# Altium PCB PCB_BearlyML Carrier Board_2022-12-21.pcbdoc (part 2 of 2)
Units mm, origin at the board's own origin, x right, y up, seen from the top; angles counter-clockwise.
Board outline 241.4 x 137.4 mm, 2 copper layers (Top Layer, Bottom Layer); 88 components, 113 nets, 672 pads, 238 vias.
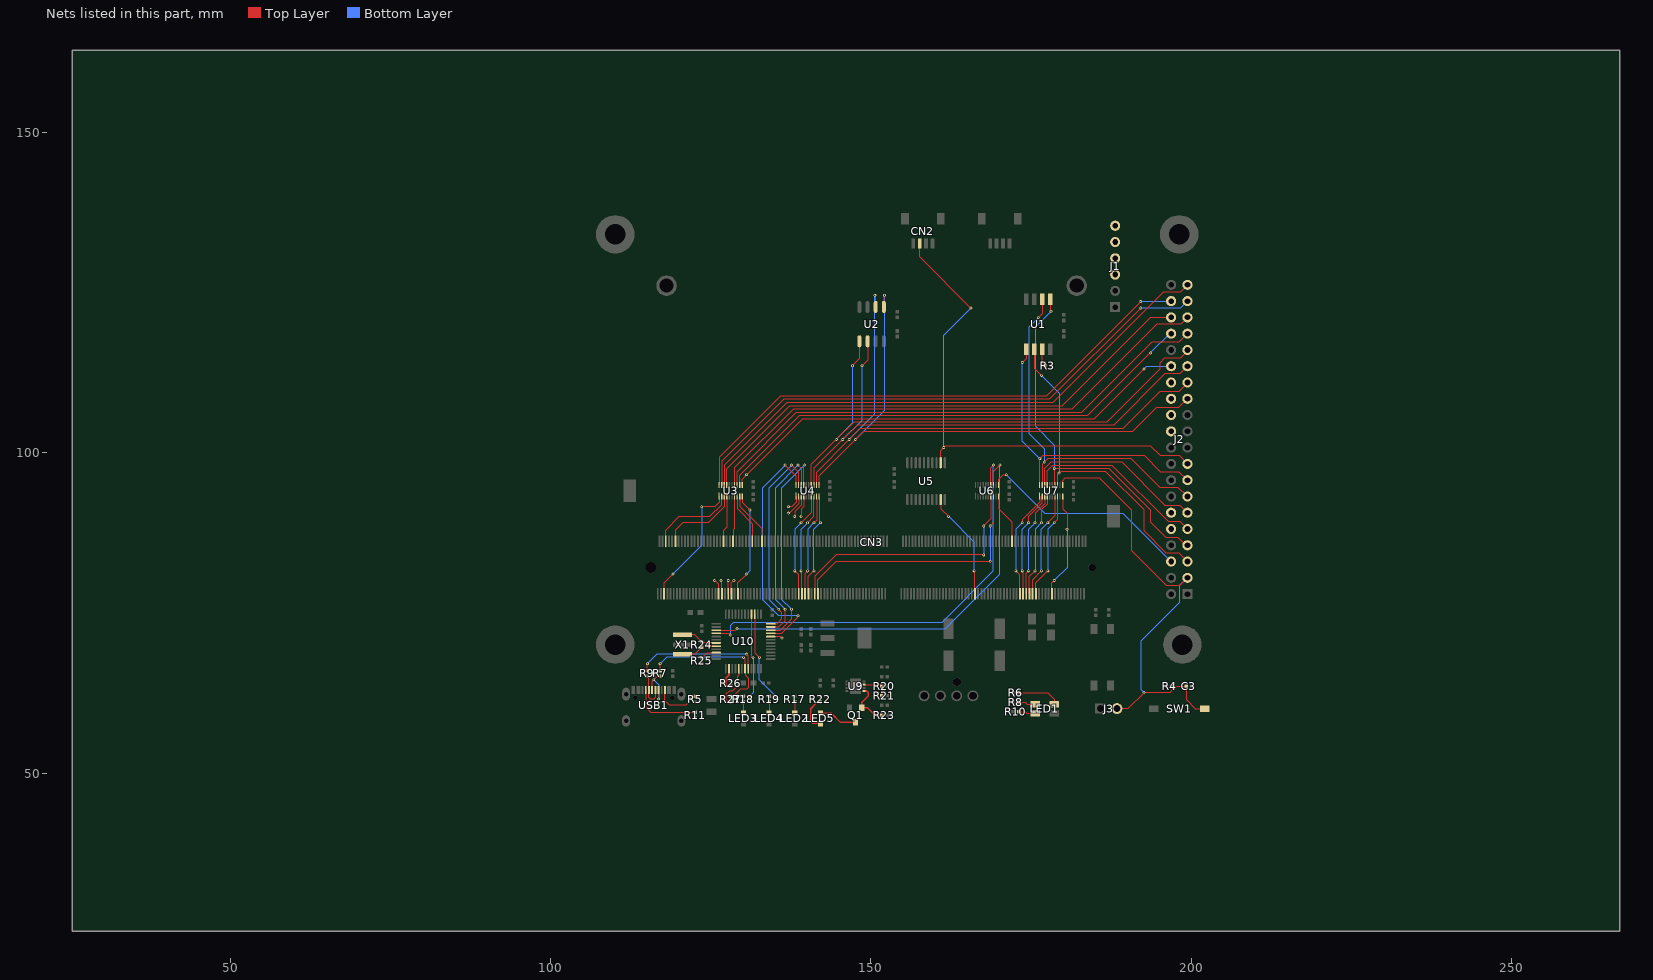
[diagram p2: the nets of this part, all layers, seen from the top]

## Via types
v1: diameter 0.45, hole 0.2, Top Layer to Bottom Layer, tented both sides, 238 vias

## Nets (pads, with @x,y where several pads share a name; then routed paths per layer and width w, separated by ;. In a path a pad name is that pad's centre, name@x,y a point inside that pad or via, vN(x,y) a via of type N, cw(c..) or ccw(c..) an arc to the next point about the centre after c; other vN are vias at no path point) (continued)
I2C1_SDA_1V8: CN3.191 U5.9 | length 16.9
  Top Layer w0.15: U5.9@160.875,92.729 160.875,91.325 v1(162.1,90.1) ; v1(166.1,81.6) 166.225,81.475 CN3.191@166.225,78.05
  Bottom Layer w0.15: v1(162.1,90.1) 166.1,86.1 v1(166.1,81.6)
I2C1_SDA_3V3: CN2.3 J2.17 U5.12 | length 78.8
  Top Layer w0.15: CN2.3@157.599,132.662 157.599,130.6 v1(165.6,122.6) ; U5.12@160.875,98.471 160.875,100.375 v1(161.35,100.85) 161.6,101.1 193.6,101.1 195.101,99.599 198.101,99.599 199.371,98.329 J2.17@199.371,98.289
  Bottom Layer w0.15: v1(161.35,100.85) 161.35,118.35 v1(165.6,122.6)
JTAG_TCK_1V8: CN3.41 U4.2 | length 20.3
  Top Layer w0.15: v1(126.6,80.1) 126.725,79.975 CN3.41@126.725,78.05 ; v1(137.1,90.6) 137.225,90.6 138.7,92.076 U4.2@138.699,93.199
  Mid-Layer 1 w0.15: v1(126.6,80.1) v1(137.1,90.6)
JTAG_TCK_3V3: J2.26 U4.19 U10.24 | length 95.4
  Top Layer w0.15: U10.24@134.35,73.35 135.35,73.35 136.1,74.1 136.1,75.1 v1(135.6,75.6) ; v1(137.6,98.1) 138.7,97 U4.19@138.7,95
  Mid-Layer 1 w0.15: v1(137.6,98.1) 147.95,108.45 J2.26@196.83,108.45
  Bottom Layer w0.15: v1(135.6,75.6) 134.1,77.1 134.1,88.1 134.1,94.6 v1(137.6,98.1)
JTAG_TDI_1V8: CN3.45 U4.3 | length 20.2
  Top Layer w0.15: CN3.45@127.725,78.05 v1(127.725,80.1) ; v1(138.1,90.1) 138.101,90.852 139.099,91.85 U4.3@139.099,93.199
  Mid-Layer 1 w0.15: v1(127.725,80.1) 127.725,80.224 130.1,82.599 130.6,82.599 v1(138.1,90.1)
JTAG_TDI_3V3: J2.24 U4.18 U10.23 | length 93.8
  Top Layer w0.15: U10.23@134.349,72.851 135.599,72.851 136.6,73.849 v1@136.6,75.599 ; v1(138.6,98.1) 139.1,97.6 U4.18@139.1,95
  Mid-Layer 1 w0.15: v1(138.6,98.1) 146.41,105.91 J2.24@196.83,105.91
  Bottom Layer w0.15: v1@136.6,75.6 135.1,77.1 135.1,94.6 v1(138.6,98.1)
  other v1: 136.6,75.6
JTAG_TDO_1V8: CN3.47 U4.4 | length 20.1
  Top Layer w0.15: CN3.47@128.225,78.05 128.225,79.725 v1(128.6,80.1) ; v1@139.099,90.1 139.099,91.225 139.5,91.626 U4.4@139.499,93.199
  Mid-Layer 1 w0.15: v1@128.599,80.1 130.349,81.85 130.849,81.85 v1@139.099,90.1
  other v1: 139.1,90.1
JTAG_TDO_3V3: J2.22 U4.17 U10.22 | length 92.6
  Top Layer w0.15: U10.22@134.35,72.35 135.85,72.35 137.1,73.6 137.6,74.1 v1(137.6,75.6) ; U4.17@139.5,95 139.5,98 v1(139.6,98.1)
  Mid-Layer 1 w0.15: v1(139.6,98.1) 144.87,103.37 J2.22@196.83,103.37
  Bottom Layer w0.15: v1(137.6,75.6) 136.1,77.1 136.1,92.1 136.1,94.6 v1(139.6,98.1)
JTAG_TMS_1V8: CN3.39 U4.1 | length 21
  Top Layer w0.15: v1(125.6,80.1) 126.225,79.475 CN3.39@126.225,78.05 ; v1(137.1,91.6) 137.6,91.601 138.299,92.3 U4.1@138.299,93.249
  Mid-Layer 1 w0.15: v1(125.6,80.1) v1(137.1,91.6)
JTAG_TMS_3V3: J2.28 U4.20 U10.21 | length 103.9
  Top Layer w0.15: U10.21@134.349,71.85 136.099,71.85 138.601,74.349 v1(138.6,74.6) ; v1(136.6,98.1) 137.6,97.1 138.3,96.4 U4.20@138.3,95
  Mid-Layer 1 w0.15: v1@136.6,98.1 149.49,110.99 J2.28@196.83,110.99
  Bottom Layer w0.15: v1@136.6,98.101 133.1,94.601 133.1,77.1 135.599,74.601 v1@138.599,74.601
JTAG_TRST_1V8: CN3.51 U3.10 | length 16.4
  Top Layer w0.15: CN3.51@129.225,78.05 129.225,79.725 v1(130.6,81.1) ; U3.10@129.9,93.2 129.9,92.3 v1(131.1,91.1)
  Bottom Layer w0.15: v1(130.6,81.1) 131.1,81.6 v1(131.1,91.1)
JTAG_TRST_3V3: J2.30 U3.11 U10.20 | length 111.3
  Top Layer w0.15: U3.11@129.899,95 129.899,95.899 139.35,105.35 184.85,105.35 v1@192.599,113.1 ; U10.20@134.35,71.35 135.85,71.35 v1(136.1,71.1)
  Mid-Layer 1 w0.15: v1(130.6,96.6) 129.35,95.35 129.35,94.1 124.6,89.35 124.6,79.85 130.6,73.85 133.35,73.85 v1(136.1,71.1)
  Bottom Layer w0.15: v1(192.6,113.1) 193.029,113.529 J2.30@196.831,113.529
LED5_2: LED5.2 Q1.3 | length 6.1
  Top Layer w0.25: LED5.2@142.1,59.4 143.8,59.4 145.25,57.95 Q1.3@147.6,57.95
QSPI0_CS_1V8: CN3.227 U7.7 | length 16.6
  Top Layer w0.15: CN3.227@175.225,78.05 175.225,80.225 v1(176.6,81.6) ; v1(177.6,89.1) 178.7,90.2 U7.7@178.7,93.2
  Bottom Layer w0.15: v1(176.6,81.6) 176.6,88.1 v1(177.6,89.1)
QSPI0_CS_3V3: J1.6 J2.7 U1.1 U7.14 | length 75.7
  Top Layer w0.15: U1.1@178.004,124.001 178.004,122.196 v1(178.099,122.101) ; v1(178.6,97.6) 178.7,97.499 U7.14@178.7,94.999 ; v1(178.6,97.6) 187.1,97.601 193.6,91.101 193.6,89.226 195.975,86.849 197.849,86.849 199.109,85.589 J2.7@199.371,85.589
  Mid-Layer 1 w0.15: v1(178.099,122.101) 178.099,125.447 J1.6@188.101,135.449
  Bottom Layer w0.15: v1@178.098,122.102 175.599,119.603 175.599,104.225 178.601,101.223 v1(178.6,97.6)
QSPI0_DQ0_1V8: CN3.219 U7.1 | length 17
  Top Layer w0.15: v1(172.6,81.6) 173.225,80.975 CN3.219@173.225,78.05 ; v1@173.6,89.099 173.6,89.6 176.3,92.3 U7.1@176.3,93.249
  Bottom Layer w0.15: v1(172.6,81.6) 172.6,88.1 v1(173.6,89.1)
QSPI0_DQ0_3V3: J1.4 J2.15 U1.5 U7.20 | length 70.9
  Top Layer w0.15: v1(173.599,114.101) 174.194,114.696 U1.5@174.194,116.201 ; U7.20@176.3,94.999 176.3,99.05 v1(176.35,99.1) 176.85,99.6 192.6,99.6 195.099,97.1 198.019,97.1 J2.15@199.371,95.749
  Mid-Layer 1 w0.15: v1(173.599,114.101) 175.601,114.101 185.599,124.098 185.599,127.598 188.101,130.1 J1.4@188.101,130.37
  Bottom Layer w0.15: v1(173.599,114.101) 173.599,101.851 v1(176.35,99.1)
QSPI0_DQ1_1V8: CN3.221 U7.2 | length 16.5
  Top Layer w0.15: v1(173.6,81.6) 173.725,81.475 CN3.221@173.725,78.05 ; v1@174.601,89.099 174.601,90.1 176.699,92.2 U7.2@176.699,93.199
  Bottom Layer w0.15: v1(173.6,81.6) 173.6,88.1 v1(174.6,89.1)
QSPI0_DQ1_3V3: J1.5 J2.13 U1.2 U7.19 | length 75
  Top Layer w0.15: v1@176.099,121.101 176.734,121.736 U1.2@176.734,124.001 ; U7.19@176.699,95 176.699,98.199 v1(177.1,98.6) 177.6,99.1 190.6,99.1 195.099,94.601 197.979,94.601 J2.13@199.371,93.209
  Mid-Layer 1 w0.15: v1(176.099,121.101) 180.1,121.101 184.601,125.599 184.601,129.407 J1.5@188.101,132.91
  Bottom Layer w0.15: v1(176.099,121.101) 174.725,119.727 174.725,102.976 177.1,100.601 v1(177.1,98.6)
QSPI0_DQ2_1V8: CN3.223 U7.3 | length 16.3
  Top Layer w0.15: CN3.223@174.225,78.045 174.225,81.225 v1@174.601,81.599 ; v1@175.599,89.099 175.599,90.598 177.1,92.099 U7.3@177.1,93.199
  Bottom Layer w0.15: v1(174.6,81.6) 174.6,88.1 v1(175.6,89.1)
QSPI0_DQ2_3V3: J2.11 U7.18 | length 28.6
  Top Layer w0.15: U7.18@177.1,94.999 177.1,97.601 178.101,98.599 189.099,98.599 195.85,91.85 198.19,91.85 J2.11@199.371,90.669
QSPI0_DQ3_1V8: CN3.225 U7.4 | length 16.3
  Top Layer w0.15: CN3.225@174.725,78.05 174.725,80.725 v1(175.6,81.6) ; v1@176.6,89.099 176.6,91.101 177.499,92 U7.4@177.499,93.199
  Bottom Layer w0.15: v1(175.6,81.6) 175.6,88.1 v1(176.6,89.1)
QSPI0_DQ3_3V3: J2.9 U7.17 | length 28.6
  Top Layer w0.15: U7.17@177.5,95 177.5,97.25 178.35,98.1 187.6,98.1 196.35,89.35 198.149,89.35 J2.9@199.37,88.13
QSPI0_SCLK_1V8: CN3.229 U7.8 | length 16.5
  Top Layer w0.15: CN3.229@175.725,78.05 175.725,79.724 v1(177.6,81.6) ; v1(178.6,89.1) 179.1,89.6 U7.8@179.1,93.2
  Bottom Layer w0.15: v1(177.6,81.6) 177.6,88.1 v1(178.6,89.1)
QSPI0_SCLK_3V3: J1.3 J2.5 U1.6 U7.13 | length 71.4
  Top Layer w0.15: U1.6@175.464,116.201 175.464,113.236 v1(176.599,112.101) ; U7.13@179.1,94.999 179.1,96.6 v1(179.35,96.85) ; v1@179.35,96.849 179.599,97.1 186.6,97.1 192.599,91.101 192.599,87.849 196.099,84.349 198.07,84.349 J2.5@199.371,83.049
  Mid-Layer 1 w0.15: v1(176.599,112.101) 186.6,122.102 186.6,126.6 187.829,127.829 J1.3@188.101,127.829
  Bottom Layer w0.15: v1(176.599,112.101) 179.35,109.35 v1(179.35,96.85)
R3_1: R3.1 U1.7 | length 2.8
  Top Layer w0.15: U1.7@176.734,116.201 176.734,114.033 R3.1@177.166,113.601
R5_1: R5.1 USB1.B5 | length 7.7
  Top Layer w0.15: USB1.B5@117.849,63.016 117.849,61.35 118.599,60.6 121.101,60.6 121.601,61.101 121.601,61.601 122.099,62.099 122.533,62.099 R5.1@122.599,62.033
R6_1: LED1.3 R6.1 | length 6.8
  Top Layer w0.15: R6.1@173.032,62.599 177.6,62.599 178.599,61.601 LED1.3@178.599,60.801
R7_1: R7.1 USB1.A6 USB1.B6 | length 7.6
  Top Layer w0.15: USB1.A6@115.85,63.015 115.85,64.35 v1(116.1,64.6) 116.667,65.167 R7.1@117.1,65.167 ; v1(116.85,61.6) USB1.B6@116.85,63.015
  Bottom Layer w0.15: v1(116.1,64.6) 116.85,63.85 v1(116.85,61.6)
R8_1: LED1.1 R8.1 | length 2.7
  Top Layer w0.15: R8.1@173.032,61.101 174.1,61.1 174.4,60.8 LED1.1@175.6,60.8
R9_1: R9.1 USB1.A7 USB1.B7 | length 5.8
  Top Layer w0.15: R9.1@115.101,65.166 115.35,64.917 USB1.B7@115.35,63.015 115.35,61.85 115.6,61.6 116.1,61.6 116.35,61.85 USB1.A7@116.35,63.015
R10_1: LED1.2 R10.1 | length 2.6
  Top Layer w0.15: R10.1@173.032,59.6 174.1,59.6 174.3,59.4 LED1.2@175.6,59.4
R11_1: R11.1 USB1.A5 | length 10.8
  Top Layer w0.15: USB1.A5@114.85,63.015 114.85,60.35 115.667,59.533 R11.1@122.6,59.533
R17_2: LED2.2 R17.2 | length 1.8
  Top Layer w0.15: LED2.2@138.1,59.4 R17.2@138.101,61.168
R18_2: LED3.2 R18.2 | length 1.8
  Top Layer w0.15: LED3.2@130.1,59.4 R18.2@130.1,61.168
R19_2: LED4.2 R19.2 | length 1.8
  Top Layer w0.15: LED4.2@134.1,59.4 R19.2@134.1,61.168
R21_2: R20.1 R21.2 U9.7 | length 4.3
  Top Layer w0.15: U9.7@148.925,63.85 151.417,63.85 R20.1@151.666,63.6 R21.2@151.667,62.1
R22_1: LED5.1 R22.1 | length 5.6
  Top Layer w0.25: LED5.1@142.1,57.8 140.9,57.8 140.6,58.1 140.6,60.1 141.667,61.167 R22.1@142.1,61.167
R23_1: Q1.1 R23.1 U9.5 | length 7.2
  Top Layer w0.25: Q1.1@148.55,60.25 149.45,60.25 150.6,59.1 R23.1@151.667,59.1 ; Q1.1@148.55,60.25 148.55,61.05 149.599,62.099 149.599,62.599 149.35,62.851 U9.5@148.924,62.851
R24_1: R24.1 U10.43 X1.1 | length 5.8
  Top Layer w0.15: X1.1@120.6,71.6 122.533,71.6 R24.1@123.6,70.533 123.783,70.35 U10.43@125.85,70.35
R24_2: R24.2 U10.44 X1.3 | length 5.8
  Top Layer w0.15: X1.3@120.6,68.6 122.533,68.6 R24.2@123.6,69.667 123.783,69.85 U10.44@125.85,69.85
R25_2: R25.2 U10.46 | length 2.6
  Top Layer w0.15: R25.2@123.6,68.033 124.417,68.85 U10.46@125.85,68.85
R26_2: R26.2 U10.2 | length 3.5
  Top Layer w0.3: U10.2@127.85,66.35 127.85,65.35 127.35,64.85 127.35,63.85 127.533,63.667 R26.2@128.101,63.668
R27_2: R27.2 U10.5 | length 6.8
  Top Layer w0.15: R27.2@128.101,61.167 127.783,61.167 127.349,61.601 127.349,62.35 127.849,62.851 128.35,62.851 129.099,63.6 129.099,65.099 129.351,65.35 U10.5@129.35,66.35
RESET_1V8: CN3.239 U7.10 | length 16.4
  Top Layer w0.15: CN3.239@178.225,78.05 178.225,79.725 v1(178.6,80.1) ; U7.10@179.9,93.2 179.9,91.3 180.6,90.6 v1(180.6,88.1)
  Bottom Layer w0.15: v1(178.6,80.1) 180.6,82.1 v1(180.6,88.1)
RESET_3V3: C3.2 J2.3 J3.2 R4.2 SW1.1 U7.11 | length 70.6
  Top Layer w0.15: U7.11@179.899,95 179.899,95.65 180.349,96.099 185.601,96.099 190.6,91.101 190.6,84.85 196.099,79.351 198.21,79.351 J2.3@199.371,80.509 ; J3.2@188.37,60.1 190.1,60.1 192.599,62.599 196.6,62.599 197.031,63.034 R4.2@197.031,63.6 ; R4.2@197.032,63.6 C3.2@199.166,63.6 199.167,61.533 200.6,60.1 SW1.1@202.05,60.1
  Bottom Layer w0.15: v1(192.6,62.6) 192.1,63.1 192.1,70.6 198.1,76.6 198.1,79.24 J2.3@199.37,80.51
RXLED: R18.1 U10.28 | length 14.1
  Top Layer w0.15: R18.1@130.1,62.033 130.167,62.1 v1(131.1,62.1) ; U10.28@131.35,74.85 131.35,68.35 v1(131.6,68.1)
  Bottom Layer w0.15: v1(131.1,62.1) 131.6,62.6 v1(131.6,68.1)
S$50: 
S$54: 
S$56: 
S$58: 
S$17923: 
S$36663: 
S$36667: 
S$36675: 
S$64641: 
SPI1_CS_1V8: CN3.95 U4.10 | length 16
  Top Layer w0.15: CN3.95@140.225,78.05 140.225,80.725 v1(141.1,81.6) ; U4.10@141.9,93.2 141.9,89.3 v1(142.1,89.1)
  Bottom Layer w0.15: v1(141.1,81.6) 141.1,88.1 v1(142.1,89.1)
SPI1_CS_3V3: J2.25 U2.1 U4.11 | length 90.1
  Top Layer w0.15: U4.11@141.899,94.999 141.901,96.401 v1(147.6,102.1) 148.851,103.351 190.849,103.351 194.601,107.1 198.019,107.1 J2.25@199.371,108.449 ; U2.1@152.005,122.782 152.1,122.877 v1(152.1,124.6)
  Bottom Layer w0.15: v1(147.6,102.1) 152.1,106.6 v1(152.1,124.6)
SPI1_MISO_1V8: CN3.93 U4.9 | length 15.9
  Top Layer w0.15: CN3.93@139.725,78.05 139.725,81.225 v1(140.1,81.6) ; v1(141.1,89.1) 141.5,89.5 U4.9@141.5,93.2
  Bottom Layer w0.15: v1(140.1,81.6) 140.1,88.1 v1(141.1,89.1)
SPI1_MISO_3V3: J2.27 U2.2 U4.12 | length 91.8
  Top Layer w0.15: U4.12@141.499,94.999 141.499,96.999 v1(146.6,102.1) 148.349,103.849 189.35,103.849 195.101,109.599 198.101,109.599 199.371,110.869 J2.27@199.371,110.989 ; v1(150.6,124.6) 150.735,124.465 U2.2@150.735,122.782
  Bottom Layer w0.15: v1(146.6,102.1) 150.6,106.1 v1(150.6,124.6)
SPI1_MOSI_1V8: CN3.89 U4.7 | length 16.5
  Top Layer w0.15: v1(138.1,81.6) 138.725,80.975 CN3.89@138.725,78.05 ; v1(139.1,89.1) 140.7,90.7 U4.7@140.7,93.2
  Bottom Layer w0.15: v1(138.1,81.6) 138.1,88.1 v1(139.1,89.1)
SPI1_MOSI_3V3: J2.31 U2.5 U4.14 | length 86.8
  Top Layer w0.15: U4.14@140.699,94.999 140.699,98.199 v1(144.6,102.1) ; v1@144.601,102.099 147.349,104.85 186.848,104.85 195.101,113.1 195.101,114.1 195.85,114.85 198.35,114.85 199.371,115.871 J2.31@199.371,116.069 ; v1(147.1,113.6) 148.195,114.695 U2.5@148.195,117.416
  Bottom Layer w0.15: v1(144.6,102.1) 147.1,104.6 v1(147.1,113.6)
SPI1_SCLK_1V8: CN3.91 U4.8 | length 16
  Top Layer w0.15: v1(139.1,81.6) 139.225,81.475 CN3.91@139.225,78.05 ; v1(140.1,89.1) 141.1,90.1 U4.8@141.1,93.2
  Bottom Layer w0.15: v1(139.1,81.6) 139.1,88.1 v1(140.1,89.1)
SPI1_SCLK_3V3: J2.29 U2.6 U4.13 | length 84.4
  Top Layer w0.15: U4.13@141.099,94.999 141.101,97.601 v1(145.6,102.1) 147.849,104.349 187.849,104.349 195.85,112.35 198.19,112.35 J2.29@199.371,113.529 ; v1(148.6,113.6) 149.465,114.465 U2.6@149.465,117.416
  Bottom Layer w0.15: v1(145.6,102.1) 148.6,105.1 v1(148.6,113.6)
SYS_CLK_EXT_1V8: CN3.214 U6.10 | length 7.8
  Top Layer w0.15: U6.10@169.9,93.2 169.9,91.3 171.975,89.225 CN3.214@171.975,86.25
SYS_CLK_EXT_3V3: J2.6 U6.11 | length 33.7
  Top Layer w0.15: U6.11@169.899,95 169.899,95.899 170.6,96.6 v1(171.1,96.6)
  Bottom Layer w0.15: v1(171.1,96.6) 177.1,90.6 189.279,90.6 J2.6@196.831,83.049
TL_CLK_1V8: CN3.12 U3.3 | length 12.4
  Top Layer w0.15: CN3.12@119.475,86.249 119.475,87.974 120.6,89.099 124.598,89.099 127.1,91.601 U3.3@127.1,93.199
TL_CLK_3V3: J2.39 U3.18 | length 87
  Top Layer w0.15: U3.18@127.1,94.999 127.1,98.101 136.849,107.849 178.35,107.849 195.599,125.099 198.24,125.099 J2.39@199.371,126.229
TL_IN_DAT_1V8: CN3.6 U3.2 | length 13.3
  Top Layer w0.15: CN3.6@117.974,86.249 117.974,87.974 120.1,90.1 124.85,90.1 126.699,91.949 U3.2@126.699,93.199
TL_IN_DAT_3V3: J2.37 U3.19 | length 86.7
  Top Layer w0.15: U3.19@126.699,95 126.699,98.698 136.351,108.35 177.849,108.35 v1@192.099,122.599
  Bottom Layer w0.15: v1(192.1,122.6) 198.28,122.6 J2.37@199.37,123.69
TL_IN_RDY_1V8: CN3.60 U3.8 | length 7.9
  Top Layer w0.15: U3.8@129.099,93.199 129.099,91.35 131.474,88.975 CN3.60@131.474,86.249
TL_IN_RDY_3V3: J2.33 U3.13 | length 81.3
  Top Layer w0.15: U3.13@129.099,95 129.099,97.1 138.35,106.351 182.851,106.351 193.849,117.349 198.111,117.349 J2.33@199.371,118.609
TL_IN_VAL_1V8: CN3.48 U3.7 | length 7
  Top Layer w0.15: CN3.48@128.474,86.249 128.474,87.974 128.7,88.2 U3.7@128.7,93.199
TL_IN_VAL_3V3: J2.35 U3.14 | length 83.1
  Top Layer w0.15: U3.14@128.7,94.999 128.7,97.7 137.849,106.849 181.349,106.849 194.601,120.1 198.319,120.1 J2.35@199.371,121.149
TL_OUT_DAT_1V8: CN3.5 U3.1 | length 19.9
  Top Layer w0.15: CN3.5@117.725,78.05 117.725,79.725 v1(119.1,81.1) ; v1(123.6,91.6) 125.6,91.6 126.3,92.3 U3.1@126.3,93.249
  Bottom Layer w0.15: v1(119.1,81.1) 123.6,85.6 v1(123.6,91.6)
TL_OUT_DAT_3V3: J2.38 U3.20 | length 84.9
  Top Layer w0.15: U3.20@126.3,94.999 126.3,99.3 135.85,108.85 177.349,108.85 v1@192.099,123.6
  Bottom Layer w0.15: v1(192.1,123.6) 196.74,123.6 J2.38@196.83,123.69
TL_OUT_RDY_1V8: CN3.66 U3.9 | length 8.4
  Top Layer w0.15: U3.9@129.5,93.199 129.5,91.7 132.975,88.225 CN3.66@132.975,86.249
TL_OUT_RDY_3V3: J2.34 U3.12 | length 78
  Top Layer w0.15: U3.12@129.5,94.999 129.5,96.501 138.85,105.85 183.849,105.85 v1@193.6,115.599
  Bottom Layer w0.15: v1@193.6,115.599 196.61,118.609 J2.34@196.831,118.609
  other v1: 193.6,115.6
TL_OUT_VAL_1V8: CN3.42 U3.4 | length 7.2
  Top Layer w0.15: CN3.42@126.976,86.249 126.976,87.849 127.499,88.373 U3.4@127.499,93.199
TL_OUT_VAL_3V3: J2.36 U3.17 | length 81.6
  Top Layer w0.15: U3.17@127.499,95 127.499,97.499 137.349,107.349 179.851,107.349 193.651,121.149 J2.36@196.831,121.149
TXLED: R19.1 U10.27 | length 15.1
  Top Layer w0.15: U10.27@131.85,74.85 131.85,68.85 v1(132.6,68.1) ; R19.1@134.1,62.033 134.167,62.1 v1(135.1,62.1)
  Bottom Layer w0.15: v1@132.599,68.101 132.599,64.588 v1@135.088,62.099
UART0_RX_1V8: CN3.101 U6.8 | length 40.5
  Top Layer w0.15: CN3.101@141.725,78.05 141.725,80.224 144.601,83.1 v1@168.599,83.1 ; v1@168.599,88.599 169.099,89.099 U6.8@169.099,93.199
  Bottom Layer w0.15: v1(168.6,83.1) v1(168.6,88.6)
UART0_RX_3V3: J2.10 U6.13 U10.39 | length 99.3
  Top Layer w0.15: U10.39@125.85,72.35 128.85,72.35 v1(129.1,72.6) ; U6.13@169.099,95 169.099,97.1 v1(170.1,98.1)
  Mid-Layer 1 w0.15: v1(170.1,98.1) 172.1,98.1 180.349,89.851 194.974,89.851 196.709,88.116 J2.10@196.831,88.129
  Bottom Layer w0.15: v1(129.1,72.6) 161.6,72.6 170.1,81.1 v1(170.1,98.1)
UART0_TX_1V8: CN3.99 U6.7 | length 40
  Top Layer w0.15: CN3.99@141.225,78.05 141.225,80.725 144.6,84.1 v1(167.6,84.1) ; v1@167.6,88.599 168.7,89.699 U6.7@168.7,93.199
  Bottom Layer w0.15: v1(167.6,84.1) v1(167.6,88.6)
UART0_TX_3V3: J2.12 U6.14 U10.40 | length 99.4
  Top Layer w0.15: U10.40@125.85,71.85 127.85,71.85 v1(128.1,71.6) ; U6.14@168.7,95 168.7,97.7 v1(169.1,98.1)
  Mid-Layer 1 w0.15: v1(169.1,98.1) 169.6,98.6 172.6,98.6 180.531,90.669 J2.12@196.831,90.669
  Bottom Layer w0.15: v1(128.1,71.6) 128.1,73.1 128.6,73.6 161.1,73.6 169.1,81.6 v1(169.1,98.1)
USBDM: R9.2 U10.8 | length 19.5
  Top Layer w0.15: R9.2@115.101,66.032 v1(115.1,67.1) ; v1(130.6,68.6) 130.85,68.35 U10.8@130.85,66.35
  Bottom Layer w0.15: v1(115.1,67.1) 116.6,68.6 v1(130.6,68.6)
USBDP: R7.2 R27.1 U10.7 | length 22.8
  Top Layer w0.15: R7.2@117.1,66.033 v1(117.1,67.1) ; R27.1@128.1,62.033 128.533,62.033 129.6,63.1 130.6,63.1 130.85,63.35 130.85,64.85 130.35,65.35 U10.7@130.35,66.35 130.35,67.85 v1(130.1,68.1)
  Bottom Layer w0.15: v1(117.1,67.1) 118.1,68.1 v1(130.1,68.1)
pads on no net: CN3. CN3.9 CN3.11 CN3.15 CN3.16 CN3.17 CN3.18 CN3.21 CN3.22 CN3.23 CN3.24 CN3.27 CN3.28 CN3.29 CN3.30 CN3.33 CN3.34 CN3.35 CN3.36 CN3.52 CN3.53 CN3.54 CN3.57 CN3.59 CN3.63 CN3.65 CN3.69 CN3.70 CN3.71 CN3.72 CN3.75 CN3.76 CN3.77 CN3.78 CN3.81 CN3.82 CN3.83 CN3.84 CN3.88 CN3.90 CN3.92 CN3.94 CN3.96 CN3.97 CN3.98 CN3.100 CN3.103 CN3.104 CN3.105 CN3.106 CN3.108 CN3.109 CN3.110 CN3.111 CN3.112 CN3.114 CN3.115 CN3.116 CN3.117 CN3.120 CN3.121 CN3.122 CN3.123 CN3.127 CN3.128 CN3.130 CN3.131 CN3.133 CN3.134 CN3.136 CN3.137 CN3.139 CN3.140 CN3.142 CN3.143 CN3.145 CN3.148 CN3.149 CN3.150 CN3.151 CN3.154 CN3.155 CN3.156 CN3.157 CN3.160 CN3.161 CN3.162 CN3.163 CN3.166 CN3.167 CN3.168 CN3.169 CN3.172 CN3.173 CN3.174 CN3.175 CN3.178 CN3.179 CN3.180 CN3.181 CN3.182 CN3.183 CN3.184 CN3.186 CN3.188 CN3.190 CN3.192 CN3.193 CN3.194 CN3.195 CN3.196 CN3.197 CN3.198 CN3.199 CN3.202 CN3.203 CN3.204 CN3.205 CN3.206 CN3.207 CN3.208 CN3.209 CN3.211 CN3.212 CN3.213 CN3.215 CN3.216 CN3.218 CN3.220 CN3.222 CN3.224 CN3.226 CN3.228 CN3.230 CN3.232 CN3.233 CN3.234 CN3.235 CN3.236 CN3.237 CN3.238 CN4. CN4.3 CN4.4 U2.3 U2.7 U5.1 U5.3 U5.4 U5.5 U5.16 U5.17 U5.18 U5.20 U10.1 U10.11 U10.12 U10.13 U10.15 U10.16 U10.17 U10.19 U10.29 U10.30 U10.32 U10.33 U10.35 U10.36 U10.37 U10.38 U10.41 U10.48 USB1. USB1.A8 USB1.B8
copper on no net: | length 0

## Polygon pours and split planes (outlines as drawn)
GND on Bottom Layer (solid): 78.1,150.1 78.1,38.1 254.1,38.1 254.1,150.1
GND on Mid-Layer 4 (solid): 70.1,150.1 70.1,38.1 246.1,38.1 246.1,150.1
1V8 on Mid-Layer 3 (solid): 62.1,150.1 62.1,38.1 238.1,38.1 238.1,150.1
5V on Mid-Layer 3 (solid): 114.1,76.1 114.1,54.1 162.1,54.1 162.1,62.6 146.1,62.6 146.1,76.1
3V3 on Mid-Layer 2 (solid): 54.1,150.1 54.1,38.1 230.1,38.1 230.1,150.1
GND on Mid-Layer 1 (solid): 46.1,150.1 46.1,38.1 222.1,38.1 222.1,150.1
GND on Top Layer (solid): 38.1,150.1 38.1,38.1 214.1,38.1 214.1,150.1
3V3 on Top Layer (solid): 181.1,83.6 181.1,88.6 184.6,88.6 184.6,83.6
1V8 on Top Layer (solid): 180.85,79.6 180.85,76.85 180.1,76.1 177.1,76.1 177.1,69.6 184.1,69.6 184.1,79.6

## Silkscreen, mask and mechanical layers (free items; w line width, h text height)
Top Overlay:
  lines w0.1 net S$36663: 182.35,66.1 182.35,70.1 ; 189.85,66.1 189.85,70.1
  lines w0.1 net S$36667: 182.1,69.85 182.35,70.1 ; 189.85,66.1 190.1,66.35
  lines w0.1 net S$36675: 182.1,66.35 182.35,66.1 ; 189.85,70.1 190.1,69.85
  lines w0.1 net S$64641: 193.457,88.159 192.957,88.159 192.957,90.669 193.457,90.669 ; 203.099,95.85 203.6,95.85 203.6,83.1 203.225,83.1 ; 203.099,98.34 203.6,98.34 203.6,100.849 203.099,100.849 ; 203.099,103.42 203.6,103.42 203.6,105.929 203.099,105.929 ; 203.099,108.5 203.6,108.5 203.6,116.099 203.35,116.1
  text "Flash Prog" at 177.6,135.3 h1.6 r357
  text "CS" at 185.475,135.15 h1
  text "Hdr" at 177.6,133.6 h1.6
  text "MISO" at 184.225,132.61 h1
  text "I2C1" at 155.1,130.35 h1.6
  text "I2C0" at 167.1,130.35 h1.6
  text "MOSI" at 184.225,130.07 h1
  text "SCLK" at 184.225,127.53 h1
  text "TL_CLK" at 200.81,125.75 h1
  text "GND" at 193.225,125.725 h1
  text "3V3" at 184.725,124.99 h1
  text "Rev1" at 114.6,124.6 h1.2 r89
  text "OUT_DAT" at 191.1,123.225 h1
  text "IN_DAT" at 200.81,123.21 h1
  text "GND" at 184.475,122.475 h1
  text "OUT_VAL" at 191.1,120.725 h1
  text "IN_VAL" at 200.81,120.67 h1
  text "IN_RDY" at 200.81,118.13 h1
  text "OUT_RDY" at 190.975,118.1 h1
  text "MOSI" at 200.855,115.676 h1
  text "GND" at 193.225,115.565 h1
  text "CARRIER BOARD" at 113.1,113.1 h2 r90
  text "SCLK" at 200.915,113.07 h1
  text "JTRST" at 192.6,112.975 h1
  text "MISO" at 200.915,110.53 h1
  text "JTMS" at 192.975,110.475 h1
  text "CS" at 200.915,107.99 h1
  text "JTCK" at 193.225,107.945 h1 r1
  text "UC Berkeley EE 194" at 165.6,106.1 h1.2 r359
  text "SCL" at 201.04,105.55 h1
  text "JTDI" at 193.35,105.35 h1
  text "2022-12-20" at 165.6,104.6 h1.2
  text "SDA" at 201.04,103.01 h1
  text "JTDO" at 193.1,102.85 h1
  text "SODIMM IO Level 1.8V" at 165.6,102.6 h1.2
  text "EE194 Bringup" at 109.6,101.6 h4 r87
  text "SCL" at 201.04,100.47 h1
  text "PA0" at 193.475,100.35 h1
  text "SDA" at 201.04,97.93 h1
  text "PA1" at 193.475,97.725 h1
  text "DQ0" at 201.04,95.39 h1 r357
  text "PA2" at 193.475,95.225 h1
  text "DQ1" at 201.04,92.85 h1
  text "PA3" at 193.475,92.725 h1
  text "TX" at 193.995,90.16 h1
  text "DQ2" at 201.02,90.181 h1
  text "DQ3" at 201.04,87.77 h1
  text "RX" at 193.87,87.62 h1
  text "CS" at 201.04,85.23 h1
  text "DEBUG_CLK" at 189.87,85.08 h1
  text "SCLK" at 200.975,82.725 h1
  text "SYS_CLK" at 191.37,82.54 h1
  text "RESET" at 201.04,80.15 h1
  text "BOOT_SEL" at 190.495,80.125 h1
  text "GND" at 201.04,77.61 h1
  text "3V3" at 193.225,77.465 h1
  text "Boot" at 179.6,73.35 h1.6 r359
  text "Write" at 189.6,73.35 h1.6
  text "Mode" at 179.6,71.85 h1.6
  text "Protect" at 189.6,71.85 h1.6
  text "QSPI" at 179.1,69.6 h1.2
  text "EN" at 190.6,69.6 h1.2
  text "HALT" at 178.85,65.6 h1.2
  text "OFF" at 190.6,65.6 h1.2
  text "RX" at 129.1,57.1 h1.6 r90
  text "TX" at 133.1,57.1 h1.6 r90
  text "3V3" at 137.1,57.1 h1.6 r90
  text "1V8" at 141.1,57.1 h1.6 r90
  text "CPU FAN" at 156.85,56.85 h1.6
  text "EXT RESET" at 184.35,56.85 h1.6
  text "RESET" at 194.85,56.85 h1.6
  text "JLCJLCJLCJLC" at 112.35,56.6 h1.4
Bottom Overlay:
  text "Note:" at 188.1,89.6 h1.2 r1
  text "The I2C level shifter might NOT work with the chip's wrong polarity. If so, try to remove U5" at 188.1,88.1 h1.2
  text "When programming U1, remove the Module Board from CN3" at 188.1,86.6 h1.2
  text "U2 is NOT compatible with the TF card on the BearlyML Module Board. Do NOT insert TF card when U2 is populated." at 188.1,85.1 h1.2
  text "Becareful with ESD. Always Earth all the instruments used in the test setup, and also yourself." at 188.1,83.6 h1.2
  text "Designed in California" at 188.1,73.1 h1.2
  text "PCB Art Credit to @Ritspoon" at 188.1,67.6 h1.2
  text "https://www.reddit.com/r/berkeley/comments/ygf9iy/waifulized_oski_part_two_i_coloured_it_this_time/" at 188.1,66.1 h1.2

## Text inside footprints (layer, text, board x,y; h text height)
CN3: Top Overlay "FOXCONN" at 182.6,83.05 h1 r180; Top Overlay "DATE CODE" at 152.85,83.05 h1 r180; Top Overlay "DDR4" at 122.6,83.05 h1 r180
SW2: Top Overlay "1" at 184.576,65.65 h1 r180; Top Overlay "2" at 187.116,65.65 h1 r180; Top Overlay "ON" at 183.56,69.349 h1